# Altium PCB broken_sodimm_dq_widths.PcbDoc (part 4 of 7)
Units mm, origin at the board's own origin, x right, y up, seen from the top; angles counter-clockwise.
Board outline 69.63 x 30.03 mm, 8 copper layers (TOP, SPLIT2, S3, VDD4, S5, S6, SPLIT7, BOTTOM), stack 1.2 mm thick; 199 components, 229 nets, 1321 pads, 785 vias.
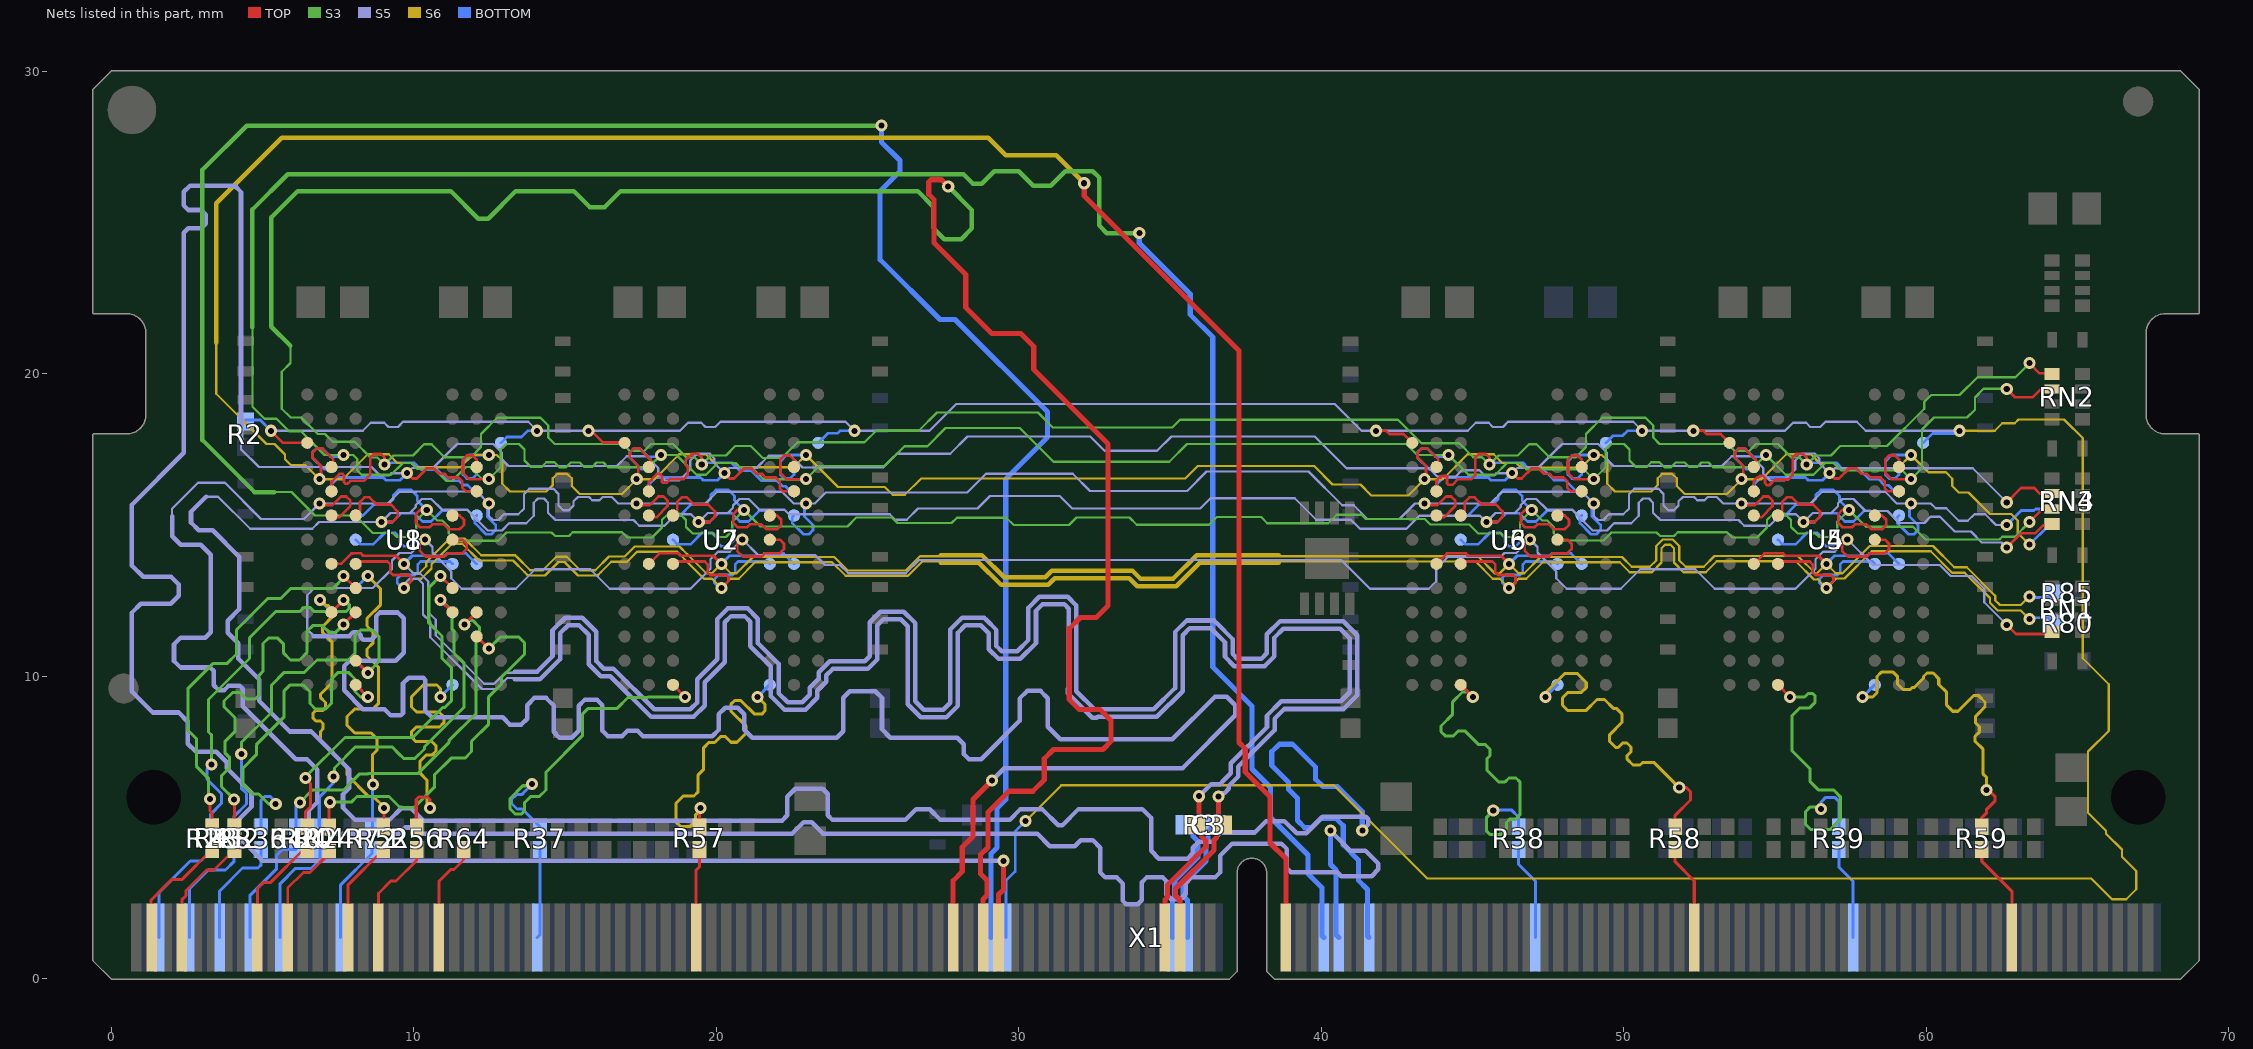
[diagram p9: the nets of this part, all layers, seen from the top]

## Via types
v1: diameter 0.4, hole 0.2, TOP to BOTTOM, tented both sides, 785 vias

## Nets (pads, with @x,y where several pads share a name; then routed paths per layer and width w, separated by ;. In a path a pad name is that pad's centre, name@x,y a point inside that pad or via, vN(x,y) a via of type N, cw(c..) or ccw(c..) an arc to the next point about the centre after c; other vN are vias at no path point) (continued)
A15: RN3.4 U1.H7 U2.H7 U3.H7 U4.H7 U5.H7 U6.H7 U7.H7 U8.H7 X1.156 | length 158.9
  TOP w0.09: U1.H7@8.073,15.317 8.212,15.456 8.212,15.768 8.362,15.918 8.531,15.918 8.769,15.68 9.235,15.68 9.461,15.454 9.461,15.276 9.285,15.1 v1(8.923,15.1) ; U2.H7@18.563,15.317 18.702,15.456 18.702,15.768 18.852,15.918 19.021,15.918 19.259,15.68 19.725,15.68 19.951,15.454 19.951,15.276 19.775,15.1 v1(19.413,15.1) ; U3.H7@44.603,15.317 44.742,15.456 44.742,15.768 44.892,15.918 45.061,15.918 45.299,15.68 45.765,15.68 45.991,15.454 45.991,15.276 45.815,15.1 v1(45.453,15.1) ; U4.H7@55.093,15.317 55.232,15.456 55.232,15.768 55.382,15.918 55.551,15.918 55.789,15.68 56.255,15.68 56.481,15.454 56.481,15.276 56.305,15.1 v1(55.943,15.1) ; v1(62.656,14.253) 63.136,14.733 63.599,14.733 63.855,14.989 64.134,14.989 RN3.4@64.149,14.974
  S5 w0.075: 3.126,15.94 3.523,15.94 4.583,14.88 6.635,14.88 6.856,15.1 v1(8.923,15.1) 9.226,15.403 9.864,15.403 10.06,15.598 10.06,15.666 10.255,15.861 10.573,15.861 10.924,15.511 11.752,15.511 12.441,14.822 12.907,14.822 13.142,15.057 13.714,15.057 13.963,15.306 13.963,15.74 14.101,15.878 14.295,15.878 14.433,15.74 14.433,15.411 14.678,15.166 17.254,15.166 17.446,14.974 18.285,14.974 18.667,15.356 19.157,15.356 v1(19.413,15.1) 19.716,15.403 20.378,15.403 20.55,15.575 20.55,15.649 20.763,15.861 21.063,15.861 21.414,15.511 22.242,15.511 22.398,15.355 25.727,15.355 25.904,15.178 26.291,15.178 26.66,15.547 28.628,15.547 29.04,15.959 31.352,15.959 31.764,15.547 35.993,15.547 36.331,15.886 39.12,15.886 39.827,15.178 40.976,15.178 41.275,14.88 42.809,14.88 43.241,15.312 45.241,15.312 v1(45.453,15.1) 45.755,15.403 46.394,15.403 46.59,15.598 46.59,15.666 46.785,15.861 47.103,15.861 47.454,15.511 48.282,15.511 48.971,14.822 49.437,14.822 49.672,15.057 50.244,15.057 50.493,15.306 50.493,15.74 50.631,15.878 50.825,15.878 50.963,15.74 50.963,15.411 51.208,15.166 53.784,15.166 53.976,14.974 54.815,14.974 55.197,15.356 55.687,15.356 v1(55.943,15.1) 56.246,15.403 56.857,15.403 57.081,15.626 57.081,15.718 57.224,15.861 57.593,15.861 57.987,15.468 58.712,15.468 59.108,15.072 59.935,15.072 60.143,15.279 60.443,15.279 60.939,14.784 61.476,14.784 61.833,14.427 62.482,14.427 v1(62.656,14.253)
  S5 w0.15: 3.126,15.94 2.628,15.442 2.628,15.083 2.882,14.829 3.344,14.829 4.216,13.957 4.216,12.219 3.839,11.842 3.839,11.442 4.193,11.088 4.193,10.589 4.889,9.893 4.889,9.185 5.898,8.176 6.609,8.176 7.852,6.933 7.852,6.3 7.653,6.101 7.653,5.659 8.06,5.252 9.19,5.252 9.576,5.638 9.909,5.638 10.295,5.252 10.322,5.225 22.168,5.225 22.345,5.402 22.345,6.021 22.602,6.278 23.519,6.278 23.679,6.118 23.679,5.409 23.836,5.252 26.246,5.252 26.598,5.604 27.052,5.604 27.404,5.252 29.69,5.252 30.05,5.612 30.764,5.612 31.295,5.081 31.438,5.081 31.969,5.612 34.075,5.612 34.369,5.318 34.369,4.228 34.623,3.974 35.572,3.974 35.751,4.153 35.751,4.336 35.952,4.537 36.381,4.537 36.681,4.837 37.793,4.837 38.167,5.211 38.778,5.211 39.181,4.808 39.494,4.808 40.045,5.359 41.466,5.359 41.551,5.274 41.551,5.101 v1(41.35,4.9)
  BOTTOM w0.09: v1(8.923,15.1) 9.285,15.1 9.58,15.395 10.004,15.395 10.284,15.115 10.562,15.115 10.919,15.472 11.118,15.472 U8.H7@11.273,15.317 ; v1(19.413,15.1) 19.775,15.1 20.07,15.395 20.494,15.395 20.774,15.115 21.052,15.115 21.409,15.472 21.608,15.472 U7.H7@21.763,15.317 ; v1(45.453,15.1) 45.815,15.1 46.11,15.395 46.534,15.395 46.814,15.115 47.092,15.115 47.449,15.472 47.648,15.472 U6.H7@47.803,15.317 ; v1(55.943,15.1) 56.305,15.1 56.6,15.395 57.024,15.395 57.304,15.115 57.582,15.115 57.939,15.472 58.138,15.472 U5.H7@58.293,15.317
  BOTTOM w0.17: v1(41.35,4.9) 41.35,5.53 40.525,6.355 40.049,6.355 39.809,6.595 39.809,6.996 39.049,7.756 38.611,7.756 38.359,7.504 38.359,7.056 38.914,6.501 38.914,6.266 39.21,5.97 39.21,5.23 39.446,4.994 39.673,4.994 39.989,5.31 40.47,5.31 40.72,5.06 40.72,4.43 41.22,3.93 41.22,3.26 41.523,2.957 41.523,1.417 X1.156@41.575,1.365
A16: RN4.2 U1.H8 U2.H8 U3.H8 U4.H8 U5.H8 U6.H8 U7.H8 U8.H8 X1.152 | length 151.9
  TOP w0.09: v1(6.873,15.717) 6.928,15.662 7.306,15.662 7.588,15.944 7.757,15.944 7.895,15.806 7.895,15.627 7.524,15.256 7.334,15.256 U1.H8@7.273,15.317 ; v1(17.363,15.717) 17.418,15.662 17.796,15.662 18.078,15.944 18.247,15.944 18.385,15.806 18.385,15.627 18.015,15.256 17.824,15.256 U2.H8@17.763,15.317 ; v1(43.403,15.717) 43.458,15.662 43.836,15.662 44.118,15.944 44.287,15.944 44.425,15.806 44.425,15.627 44.054,15.256 43.863,15.256 U3.H8@43.803,15.317 ; v1(53.893,15.717) 53.948,15.662 54.326,15.662 54.608,15.944 54.777,15.944 54.915,15.806 54.915,15.627 54.544,15.256 54.354,15.256 U4.H8@54.293,15.317
  S5 w0.075: 2.004,15.29 2.004,15.542 2.86,16.398 3.749,16.398 4.943,15.205 6.361,15.205 v1(6.873,15.717) 6.877,15.713 9.143,15.713 9.533,16.103 10.075,16.103 10.081,16.109 12.081,16.109 v1(12.473,15.717) 12.473,15.312 12.614,15.171 12.794,15.171 12.978,15.355 13.447,15.355 13.635,15.543 13.635,16.021 13.812,16.198 14.609,16.198 14.781,16.026 14.781,15.649 14.936,15.494 15.124,15.494 15.276,15.646 15.276,15.785 15.42,15.93 15.786,15.93 15.893,15.823 16.131,15.823 16.238,15.93 16.538,15.93 16.751,15.717 v1(17.363,15.717) 17.368,15.713 19.633,15.713 20.023,16.103 22.167,16.103 22.553,15.717 v1(22.963,15.717) 23.25,15.717 23.613,16.08 28.289,16.08 28.908,16.699 31.78,16.699 32.351,16.128 35.563,16.128 36.204,16.769 39.57,16.769 40.686,15.653 41.067,15.653 41.516,15.205 42.578,15.205 43.091,15.717 v1(43.403,15.717) 43.408,15.713 45.593,15.713 45.983,16.103 48.618,16.103 v1(49.003,15.717) 49.003,15.312 49.144,15.171 49.324,15.171 49.508,15.355 49.977,15.355 50.166,15.543 50.166,16.021 50.343,16.198 51.139,16.198 51.311,16.026 51.311,15.649 51.466,15.494 51.654,15.494 51.806,15.646 51.806,15.785 51.95,15.93 52.316,15.93 52.423,15.823 52.661,15.823 52.768,15.93 53.068,15.93 53.281,15.717 v1(53.893,15.717) 53.897,15.713 56.163,15.713 56.553,16.103 58.638,16.103 59.023,15.717 v1(59.493,15.717) 60.145,15.717 60.308,15.555 60.655,15.555 61.07,15.139 61.37,15.139 61.59,15.359 61.947,15.359 62.303,15.003 v1(62.656,15.003)
  S5 w0.15: 2.004,15.29 2.004,14.636 2.292,14.348 2.955,14.348 3.285,14.018 3.285,11.457 3.103,11.275 2.282,11.275 2.066,11.059 2.066,10.507 2.282,10.291 3.265,10.291 3.377,10.179 3.377,9.707 3.537,9.547 3.733,9.547 3.868,9.682 4.247,9.682 4.336,9.593 4.336,9.009 6.087,7.258 6.463,7.258 6.809,6.912 6.809,5.846 6.514,5.551 6.514,5.062 6.774,4.802 9.508,4.802 9.708,5.002 9.954,5.002 10.154,4.802 22.506,4.802 22.878,5.174 23.147,5.174 23.519,4.802 30.6,4.802 31.02,4.382 31.845,4.382 32.046,4.583 32.446,4.583 32.691,4.338 32.691,3.516 32.857,3.35 33.236,3.35 33.439,3.147 33.439,2.574 33.549,2.464 33.925,2.464 34.054,2.593 34.054,3.186 34.218,3.35 34.749,3.35 34.878,3.221 34.878,2.781 35.03,2.629 35.343,2.629 35.513,2.799 35.513,3.162 35.701,3.35 36.482,3.35 36.647,3.515 36.647,4.063 37.055,4.471 38.677,4.471 38.859,4.289 38.859,3.655 38.992,3.522 40.531,3.522 40.658,3.395 41.66,3.395 41.883,3.618 41.883,3.81 41.455,4.238 40.962,4.238 v1(40.3,4.9)
  BOTTOM w0.09: U8.H8@12.073,15.317 12.012,15.256 12.012,15.066 12.382,14.696 12.563,14.696 12.7,14.833 12.7,15.002 12.418,15.284 12.418,15.662 v1(12.473,15.717) ; U7.H8@22.563,15.317 22.502,15.256 22.502,15.066 22.872,14.696 23.053,14.696 23.19,14.833 23.19,15.002 22.908,15.284 22.908,15.662 v1(22.963,15.717) ; U6.H8@48.603,15.317 48.542,15.256 48.542,15.066 48.912,14.696 49.093,14.696 49.23,14.833 49.23,15.002 48.948,15.284 48.948,15.662 v1(49.003,15.717) ; U5.H8@59.093,15.317 59.032,15.256 59.032,15.066 59.402,14.696 59.583,14.696 59.72,14.833 59.72,15.002 59.438,15.284 59.438,15.662 v1(59.493,15.717) ; v1(62.656,15.003) 63.136,15.483 63.559,15.483 63.609,15.533 RN4.2@64.149,15.533
  BOTTOM w0.17: v1(40.3,4.9) 40.3,3.779 40.486,3.593 40.486,1.454 X1.152@40.575,1.365
ACT: RN3.3 U1.H3 U2.H3 U3.H3 U4.H3 U5.H3 U6.H3 U7.H3 U8.H3 X1.114 | length 158.2
  TOP w0.09: v1(10.423,15.499) 10.196,15.499 10.067,15.37 10.067,15.066 10.204,14.929 10.518,14.929 10.615,15.026 10.994,15.026 11.158,14.862 11.509,14.862 11.652,15.005 11.652,15.175 11.51,15.317 U1.H3@11.273,15.317 ; v1(20.913,15.499) 20.686,15.499 20.557,15.37 20.557,15.066 20.694,14.929 21.008,14.929 21.105,15.026 21.484,15.026 21.648,14.862 21.999,14.862 22.142,15.005 22.142,15.175 22,15.317 U2.H3@21.763,15.317 ; v1(46.953,15.499) 46.726,15.499 46.597,15.37 46.597,15.066 46.734,14.929 47.048,14.929 47.145,15.026 47.524,15.026 47.688,14.862 48.039,14.862 48.182,15.005 48.182,15.175 48.04,15.317 U3.H3@47.803,15.317 ; v1(57.443,15.499) 57.216,15.499 57.087,15.37 57.087,15.066 57.224,14.929 57.538,14.929 57.635,15.026 58.014,15.026 58.178,14.862 58.529,14.862 58.672,15.005 58.672,15.175 58.53,15.317 U4.H3@58.293,15.317 ; v1(63.406,15.103) 63.816,15.513 64.129,15.513 RN3.3@64.149,15.533
  S3 w0.075: 5.381,16.092 5.952,16.092 6.727,15.317 8.056,15.317 8.636,14.738 9.299,14.738 9.435,14.602 9.823,14.602 10.073,14.852 10.073,15.149 v1(10.423,15.499) 10.773,15.149 10.931,15.149 11.146,14.934 11.146,14.729 11.393,14.482 12.785,14.482 13.06,14.757 14.545,14.757 14.667,14.635 15.125,14.635 15.252,14.762 16.879,14.762 17.054,14.587 17.872,14.587 18.202,14.917 18.202,15.173 18.405,15.376 18.79,15.376 18.994,15.172 18.994,14.939 19.213,14.72 19.901,14.72 20.019,14.602 20.313,14.602 20.526,14.815 20.526,15.112 v1(20.913,15.499) 21.456,14.956 24.328,14.956 24.62,15.249 25.799,15.249 25.981,15.066 27.771,15.066 27.948,15.243 29.584,15.243 29.827,15 31.651,15 31.905,15.254 33.652,15.254 33.895,15.011 36.283,15.011 36.537,15.265 38.008,15.265 38.212,15.061 40.224,15.061 40.506,15.343 41.323,15.343 41.461,15.205 43.419,15.205 43.601,15.022 44.884,15.022 45.187,14.72 45.936,14.72 46.053,14.603 46.353,14.603 46.565,14.815 46.565,15.112 v1(46.953,15.499) 47.303,15.149 47.461,15.149 47.676,14.934 47.676,14.729 47.915,14.49 49.323,14.49 49.59,14.757 51.075,14.757 51.197,14.635 51.655,14.635 51.782,14.762 53.409,14.762 53.584,14.587 54.402,14.587 54.732,14.917 54.732,15.173 54.935,15.376 55.32,15.376 55.524,15.172 55.524,14.939 55.744,14.72 56.337,14.72 56.455,14.602 56.843,14.602 57.056,14.815 57.056,15.112 v1(57.443,15.499) 58.001,14.941 59.554,14.941 59.973,14.522 62.412,14.522 62.506,14.616 62.919,14.616 v1(63.406,15.103)
  S3 w0.15: 5.381,16.092 4.727,16.092 3.008,17.811 3.008,26.744 4.469,28.205 v1(25.45,28.205)
  BOTTOM w0.09: U8.H3@8.073,15.317 8.312,15.317 8.675,15.68 9.127,15.68 9.318,15.871 9.318,15.987 9.496,16.165 9.902,16.165 10.107,15.96 10.107,15.815 v1(10.423,15.499) ; U7.H3@18.563,15.317 18.802,15.317 19.165,15.68 19.617,15.68 19.808,15.871 19.808,15.987 19.986,16.165 20.392,16.165 20.597,15.96 20.597,15.815 v1(20.913,15.499) ; U6.H3@44.603,15.317 44.842,15.317 45.205,15.68 45.657,15.68 45.848,15.871 45.848,15.987 46.026,16.165 46.432,16.165 46.637,15.96 46.637,15.815 v1(46.953,15.499) ; U5.H3@55.093,15.317 55.332,15.317 55.695,15.68 56.147,15.68 56.338,15.871 56.338,15.987 56.516,16.165 56.922,16.165 57.127,15.96 57.127,15.815 v1(57.443,15.499)
  BOTTOM w0.17: v1(25.45,28.205) 25.45,27.665 26.065,27.05 26.065,26.7 25.411,26.046 25.411,23.771 27.386,21.796 27.887,21.796 30.949,18.734 30.949,17.909 29.562,16.522 29.562,5.926 29.28,5.644 29.28,4.341 29.075,4.136 X1.114@29.075,1.365
ALERT: R2.1 U1.L9 U2.L9 U3.L9 U4.L9 U5.L9 U6.L9 U7.L9 U8.L9 X1.116 | length 133.6
  TOP w0.09: v1(5.273,18.117) 5.673,17.717 U1.L9@6.473,17.717 ; v1(15.763,18.117) 15.866,18.117 16.251,17.732 16.948,17.732 U2.L9@16.963,17.717 ; v1(41.803,18.117) 42.142,18.117 42.247,18.012 42.708,18.012 U3.L9@43.003,17.717 ; v1(52.293,18.117) 52.632,18.117 52.737,18.012 53.198,18.012 U4.L9@53.493,17.717
  S5 w0.075: v1(5.273,18.117) 8.305,18.117 8.568,18.38 9.021,18.38 9.156,18.244 9.473,18.244 9.641,18.412 13.778,18.412 v1(14.073,18.117) v1(15.763,18.117) 18.795,18.117 19.058,18.38 19.501,18.38 19.636,18.244 19.963,18.244 20.131,18.412 24.268,18.412 v1(24.563,18.117) 27.042,18.117 27.926,19.001 40.439,19.001 41.323,18.117 v1(41.803,18.117) 44.835,18.117 45.098,18.38 45.529,18.38 45.664,18.244 46.003,18.244 46.171,18.412 50.308,18.412 v1(50.603,18.117) v1(52.293,18.117) 55.325,18.117 55.588,18.38 56.026,18.38 56.161,18.244 56.493,18.244 56.661,18.412 57.7,18.412 57.995,18.117 v1(61.093,18.117)
  S6 w0.075: v1(30.216,5.212) 31.403,6.399 40.414,6.399 43.5,3.313 65.45,3.313 66.133,2.63 66.605,2.63 66.937,2.962 66.937,3.56 66.463,4.034 66.463,4.276 65.94,4.798 65.94,4.892 65.343,5.489 65.343,7.515 66.025,8.196 66.025,9.738 65.165,10.598 65.165,17.877 64.551,18.491 63.043,18.491 62.918,18.366 62.506,18.366 62.257,18.117 v1(61.093,18.117)
  BOTTOM w0.09: R2.1@4.428,18.473 4.917,18.473 v1(5.273,18.117) ; U8.L9@12.873,17.717 13.069,17.913 13.554,17.913 13.758,18.117 v1(14.073,18.117) ; U7.L9@23.363,17.717 23.678,18.032 23.997,18.032 24.082,18.117 v1(24.563,18.117) ; X1.116@29.575,1.365 29.575,3.25 29.874,3.549 29.874,4.87 v1(30.216,5.212) ; U6.L9@49.403,17.717 49.639,17.953 49.958,17.953 50.122,18.117 v1(50.603,18.117) ; U5.L9@59.893,17.717 60.201,18.025 60.923,18.025 61.015,18.117 v1(61.093,18.117)
BA0: RN2.2 U1.K2 U2.K2 U3.K2 U4.K2 U5.K2 U6.K2 U7.K2 U8.K2 X1.150 | length 153.4
  TOP w0.09: U1.K2@12.073,16.917 12.073,17.168 11.943,17.298 11.747,17.298 11.618,17.169 11.618,16.725 11.826,16.517 v1(12.473,16.517) ; U2.K2@22.563,16.917 22.563,17.168 22.433,17.298 22.237,17.298 22.108,17.169 22.108,16.725 22.316,16.517 v1(22.963,16.517) ; U3.K2@48.603,16.917 48.603,17.168 48.473,17.298 48.277,17.298 48.148,17.169 48.148,16.725 48.356,16.517 v1(49.003,16.517) ; U4.K2@59.093,16.917 59.093,17.168 58.963,17.298 58.767,17.298 58.638,17.169 58.638,16.725 58.846,16.517 v1(59.493,16.517) ; v1(62.656,19.503) 62.936,19.223 63.514,19.223 63.766,19.475 64.121,19.475 RN2.2@64.149,19.503
  S3 w0.075: 4.66,21.539 4.66,18.914 5.057,18.517 5.453,18.517 5.869,18.101 6.261,18.101 7.045,17.317 v1(7.673,17.317) 7.996,17.317 8.126,17.187 8.126,16.805 8.268,16.663 9.243,16.663 9.633,17.053 9.913,17.053 10.11,16.855 10.68,16.855 11.079,16.456 11.254,16.456 11.719,16.921 11.849,16.921 12.253,16.517 v1(12.473,16.517) 12.866,16.91 12.866,17.512 13.036,17.682 13.473,17.682 13.655,17.5 13.655,17.136 13.867,16.924 14.225,16.924 14.374,17.073 14.649,17.073 14.812,16.91 15.024,16.91 15.181,17.067 15.484,17.067 15.622,16.929 15.894,16.929 16.032,17.067 16.262,17.067 16.419,16.91 17.756,16.91 v1(18.163,17.317) 18.683,17.317 19.337,16.663 19.653,16.663 20.043,17.053 20.632,17.053 20.773,16.912 21.158,16.912 21.552,16.517 v1(22.963,16.517) 23.4,16.954 25.558,16.954 26.213,17.609 26.976,17.609 27.573,18.206 30.026,18.206 31.14,17.092 34.97,17.092 35.558,17.679 42.807,17.679 43.169,17.317 v1(44.203,17.317) 44.857,16.663 45.744,16.663 46.134,17.053 46.566,17.053 46.774,16.845 48.675,16.845 v1(49.003,16.517) 49.396,16.91 49.396,17.512 49.566,17.682 50.003,17.682 50.185,17.5 50.185,17.136 50.397,16.924 50.755,16.924 50.904,17.073 51.179,17.073 51.342,16.91 51.554,16.91 51.711,17.067 52.014,17.067 52.152,16.929 52.424,16.929 52.562,17.067 52.792,17.067 52.949,16.91 54.286,16.91 v1(54.693,17.317) 55.347,16.663 56.263,16.663 56.653,17.053 56.933,17.053 57.18,16.805 59.205,16.805 v1(59.493,16.517) 59.855,16.88 59.855,18.157 60.253,18.555 61.345,18.555 61.604,18.813 61.604,19.22 61.887,19.503 v1(62.656,19.503)
  S3 w0.15: 4.66,21.539 4.66,25.432 5.826,26.598 28.166,26.598 28.479,26.286 28.767,26.286 29.182,26.7 29.989,26.7 30.475,26.214 31.048,26.214 31.534,26.7 32.44,26.7 32.651,26.489 32.651,24.906 32.906,24.651 v1(33.978,24.651)
  BOTTOM w0.09: U8.K2@7.273,16.917 7.212,16.856 7.022,16.856 6.652,17.226 6.652,17.407 6.789,17.544 6.958,17.544 7.24,17.262 7.618,17.262 v1(7.673,17.317) ; U7.K2@17.763,16.917 17.702,16.856 17.512,16.856 17.142,17.226 17.142,17.407 17.279,17.544 17.448,17.544 17.73,17.262 18.108,17.262 v1(18.163,17.317) ; U6.K2@43.803,16.917 43.742,16.856 43.552,16.856 43.182,17.226 43.182,17.407 43.319,17.544 43.488,17.544 43.77,17.262 44.148,17.262 v1(44.203,17.317) ; U5.K2@54.293,16.917 54.232,16.856 54.042,16.856 53.672,17.226 53.672,17.407 53.809,17.544 53.978,17.544 54.26,17.262 54.638,17.262 v1(54.693,17.317)
  BOTTOM w0.17: v1(33.978,24.651) 33.978,24.325 35.665,22.638 35.665,21.956 36.408,21.213 36.408,10.31 37.705,9.013 37.705,6.933 38.317,6.321 38.317,5.332 39.555,4.094 39.555,3.471 40.014,3.012 40.014,1.426 X1.150@40.075,1.365
BA1: RN4.1 U1.K8 U2.K8 U3.K8 U4.K8 U5.K8 U6.K8 U7.K8 U8.K8 X1.145 | length 153.9
  TOP w0.09: v1(6.873,16.517) 6.928,16.572 6.928,16.95 6.646,17.232 6.646,17.401 6.783,17.538 6.964,17.538 7.334,17.168 7.334,16.978 U1.K8@7.273,16.917 ; v1(17.363,16.517) 17.418,16.572 17.418,16.95 17.136,17.232 17.136,17.401 17.273,17.538 17.454,17.538 17.824,17.168 17.824,16.978 U2.K8@17.763,16.917 ; v1(43.403,16.517) 43.458,16.572 43.458,16.95 43.176,17.232 43.176,17.401 43.313,17.538 43.494,17.538 43.864,17.168 43.864,16.978 U3.K8@43.803,16.917 ; v1(53.893,16.517) 53.948,16.572 53.948,16.95 53.666,17.232 53.666,17.401 53.803,17.538 53.984,17.538 54.354,17.168 54.354,16.978 U4.K8@54.293,16.917
  TOP w0.17: v1(32.157,26.3) 32.157,25.883 37.276,20.763 37.276,7.808 37.479,7.605 37.479,6.84 38.302,6.017 38.302,4.493 38.825,3.97 X1.145@38.825,1.365
  S6 w0.075: 3.461,21.03 3.461,19.342 5.123,17.68 5.387,17.68 5.736,17.332 5.736,17.177 5.933,16.98 6.41,16.98 v1(6.873,16.517) 7.649,16.517 8.47,17.338 9.163,17.338 9.448,17.053 9.913,17.053 10.054,16.912 11.529,16.912 11.935,17.317 v1(12.473,17.317) 12.739,17.317 12.917,17.139 12.917,16.367 13.174,16.11 14.376,16.11 14.592,16.325 14.592,16.551 14.741,16.7 15.062,16.7 15.217,16.545 15.217,16.29 15.479,16.028 16.874,16.028 v1(17.363,16.517) 17.948,16.517 18.769,17.338 19.653,17.338 19.938,17.053 20.632,17.053 20.773,16.912 22.557,16.912 v1(22.963,17.317) 24.019,16.261 25.566,16.261 25.828,15.999 26.228,15.999 26.77,16.541 35.498,16.541 35.909,16.952 39.759,16.952 40.368,16.343 41.287,16.343 41.649,15.981 42.867,15.981 v1(43.403,16.517) 44.01,16.517 44.83,17.338 45.693,17.338 45.978,17.053 46.443,17.053 46.595,16.9 48.586,16.9 v1(49.003,17.317) 49.269,17.317 49.447,17.139 49.447,16.367 49.705,16.11 50.906,16.11 51.122,16.325 51.122,16.551 51.271,16.7 51.592,16.7 51.747,16.545 51.747,16.29 52.008,16.028 53.404,16.028 v1(53.893,16.517) 54.548,16.517 55.369,17.338 56.183,17.338 56.468,17.053 56.933,17.053 57.11,16.875 59.051,16.875 v1(59.493,17.317) 60.067,16.743 60.648,16.743 60.858,16.534 60.858,16.292 61.07,16.08 61.389,16.08 62.103,15.366 62.806,15.366 63.018,15.153 63.018,14.741 v1(63.406,14.353)
  S6 w0.15: 3.461,21.03 3.461,25.64 5.626,27.805 28.985,27.805 29.563,27.227 31.23,27.227 v1(32.157,26.3)
  BOTTOM w0.09: U8.K8@12.073,16.917 12.073,16.666 11.943,16.536 11.747,16.536 11.618,16.665 11.618,17.109 11.826,17.317 v1(12.473,17.317) ; U7.K8@22.563,16.917 22.563,16.666 22.433,16.536 22.237,16.536 22.108,16.665 22.108,17.109 22.316,17.317 v1(22.963,17.317) ; U6.K8@48.603,16.917 48.603,16.666 48.473,16.536 48.277,16.536 48.148,16.665 48.148,17.109 48.356,17.317 v1(49.003,17.317) ; U5.K8@59.093,16.917 59.093,16.666 58.963,16.536 58.767,16.536 58.638,16.665 58.638,17.109 58.846,17.317 v1(59.493,17.317) ; v1(63.406,14.353) 64.027,14.974 RN4.1@64.149,14.974
BG0: RN3.2 U1.J2 U2.J2 U3.J2 U4.J2 U5.J2 U6.J2 U7.J2 U8.J2 X1.115 | length 158.3
  TOP w0.09: v1(9.773,16.715) 9.948,16.54 10.091,16.54 10.43,16.879 10.649,16.879 10.832,16.696 11.006,16.696 11.13,16.572 11.469,16.572 11.6,16.441 11.6,16.232 11.715,16.117 U1.J2@12.073,16.117 ; v1(20.263,16.715) 20.438,16.54 20.581,16.54 20.92,16.879 21.139,16.879 21.322,16.696 21.496,16.696 21.62,16.572 21.959,16.572 22.09,16.441 22.09,16.232 22.205,16.117 U2.J2@22.563,16.117 ; v1(46.303,16.715) 46.478,16.54 46.621,16.54 46.96,16.879 47.179,16.879 47.362,16.696 47.536,16.696 47.66,16.572 47.999,16.572 48.13,16.441 48.13,16.232 48.245,16.117 U3.J2@48.603,16.117 ; v1(56.793,16.715) 56.968,16.54 57.111,16.54 57.45,16.879 57.669,16.879 57.852,16.696 58.026,16.696 58.15,16.572 58.489,16.572 58.62,16.441 58.62,16.232 58.735,16.117 U4.J2@59.093,16.117 ; v1(62.656,15.753) 63.126,16.223 63.564,16.223 63.744,16.043 64.147,16.043 RN3.2@64.149,16.041
  TOP w0.17: X1.115@29.325,1.365 29.325,2.783 29.485,2.943 v1(29.485,3.902)
  S5 w0.075: 4.281,17.786 4.281,17.509 4.873,16.917 8.593,16.917 8.873,16.637 9.169,16.637 9.247,16.715 v1(9.773,16.715) 9.944,16.887 10.633,16.887 11.425,17.679 12.623,17.679 12.91,17.392 12.91,17.167 13.123,16.954 16.713,16.954 17.033,17.275 17.693,17.275 18.077,16.89 18.077,16.699 18.302,16.474 18.772,16.474 19.133,16.835 19.133,17.133 19.363,17.363 19.771,17.363 19.93,17.204 19.93,17.048 v1(20.263,16.715) 20.435,16.887 21.322,16.887 21.73,17.294 22.454,17.294 22.841,16.907 25.511,16.907 25.959,17.355 27.728,17.355 28.298,17.925 32.358,17.925 32.829,17.454 34.567,17.454 35.042,17.929 39.779,17.929 40.829,16.88 43.553,16.88 43.836,16.597 44.429,16.597 44.645,16.813 45.227,16.813 45.403,16.638 45.703,16.638 45.781,16.715 v1(46.303,16.715) 46.474,16.887 47.162,16.887 47.955,17.679 49.153,17.679 49.441,17.392 49.441,17.167 49.653,16.954 53.243,16.954 53.563,17.275 54.223,17.275 54.607,16.89 54.607,16.699 54.832,16.474 55.302,16.474 55.663,16.835 55.663,17.133 55.893,17.363 56.301,17.363 56.46,17.204 56.46,17.048 v1(56.793,16.715) 56.957,16.88 61.53,16.88 v1(62.656,15.753)
  S5 w0.15: 4.281,17.786 4.281,26.01 4.071,26.22 2.597,26.22 2.391,26.014 2.391,25.716 2.391,25.566 2.541,25.416 2.966,25.416 3.116,25.266 3.116,24.966 2.966,24.816 2.541,24.816 2.391,24.666 2.391,24.638 2.391,17.388 0.677,15.674 0.677,13.657 1.047,13.287 1.969,13.287 2.219,13.037 2.219,12.662 1.959,12.402 0.971,12.402 0.677,12.108 0.677,9.489 1.362,8.804 2.22,8.804 2.524,8.5 2.524,7.775 2.794,7.505 3.461,7.505 3.806,7.16 3.806,6.969 4.629,6.146 4.629,5.687 4.15,5.208 4.15,4.746 4.994,3.902 v1(29.485,3.902)
  BOTTOM w0.09: U8.J2@7.273,16.117 7.273,16.338 7.507,16.572 8.984,16.572 9.073,16.483 9.541,16.483 v1(9.773,16.715) ; U7.J2@17.763,16.117 17.763,16.338 17.997,16.572 19.474,16.572 19.563,16.483 20.031,16.483 v1(20.263,16.715) ; U6.J2@43.803,16.117 43.803,16.338 44.037,16.572 45.514,16.572 45.603,16.483 46.071,16.483 v1(46.303,16.715) ; U5.J2@54.293,16.117 54.293,16.338 54.527,16.572 56.004,16.572 56.093,16.483 56.561,16.483 v1(56.793,16.715)
BG1: RN2.1 U1.J8 U2.J8 U3.J8 U4.J8 U5.J8 U6.J8 U7.J8 U8.J8 X1.113 | length 163.6
  TOP w0.09: U1.J8@7.273,16.117 7.273,16.429 7.539,16.695 7.633,16.695 7.688,16.64 7.688,16.419 7.742,16.365 7.805,16.365 7.902,16.462 8.349,16.462 8.557,16.67 8.557,17.237 8.674,17.354 8.906,17.354 9.023,17.237 v1(9.023,17) ; U2.J8@17.763,16.117 17.763,16.429 18.029,16.695 18.126,16.695 18.199,16.622 18.199,16.436 18.237,16.398 18.35,16.398 18.472,16.52 18.917,16.52 19.047,16.65 19.047,16.918 18.983,16.982 18.983,17.144 19.102,17.263 19.193,17.354 19.396,17.354 19.513,17.237 v1(19.513,17) ; U3.J8@43.803,16.117 43.803,16.479 43.896,16.572 43.946,16.572 43.994,16.62 44.116,16.62 44.154,16.582 44.154,16.375 44.198,16.331 44.329,16.331 44.517,16.519 44.956,16.519 45.087,16.65 45.087,17.237 45.204,17.354 45.436,17.354 45.553,17.237 v1(45.553,17) ; U4.J8@54.293,16.117 54.293,16.469 54.396,16.572 54.436,16.572 54.493,16.629 54.608,16.629 54.663,16.574 54.663,16.389 54.735,16.317 54.805,16.317 54.998,16.51 55.437,16.51 55.577,16.65 55.577,17.237 55.694,17.354 55.926,17.354 56.043,17.237 v1(56.043,17) ; v1(63.406,20.353) 63.742,20.017 64.104,20.017 RN2.1@64.149,20.062
  TOP w0.17: v1(27.661,26.198) 27.442,26.417 27.093,26.417 27.018,26.342 27.018,25.935 27.197,25.756 27.197,24.329 28.243,23.283 28.243,22.194 29.108,21.329 30.065,21.329 30.491,20.903 30.491,20.14 32.945,17.686 32.945,12.336 32.558,11.949 32.039,11.949 31.663,11.573 31.663,9.229 31.994,8.898 32.692,8.898 33.046,8.544 33.046,7.853 32.776,7.583 31.144,7.583 30.834,7.273 30.834,6.577 30.458,6.201 29.673,6.201 28.977,5.505 28.977,4.344 28.733,4.1 28.733,3.471 28.938,3.266 28.938,2.754 28.806,2.622 28.806,1.384 X1.113@28.825,1.365
  S3 w0.075: 5.917,20.925 5.917,20.354 5.63,20.067 5.63,18.847 5.923,18.555 6.268,18.555 6.815,18.008 7.062,18.008 7.317,17.753 8.044,17.753 8.563,17.234 8.789,17.234 v1(9.023,17) 9.326,17.303 9.964,17.303 10.335,17.674 10.583,17.674 11.011,17.246 11.884,17.246 12.216,17.578 12.216,18.009 12.752,18.545 14.183,18.545 14.436,18.293 14.436,17.895 14.65,17.68 16.905,17.68 17.134,17.451 17.609,17.451 17.838,17.68 18.567,17.68 19.012,17.235 19.278,17.235 v1(19.513,17) 19.816,17.303 20.313,17.303 20.622,17.612 21.136,17.612 21.531,17.216 22.161,17.216 22.681,17.736 24.897,17.736 25.278,18.117 26.689,18.117 27.291,18.719 30.63,18.719 31.121,18.228 35.069,18.228 35.321,18.48 42.533,18.48 43.31,17.702 44.562,17.702 45.019,17.245 45.308,17.245 v1(45.553,17) 45.855,17.303 46.493,17.303 46.865,17.674 47.113,17.674 47.541,17.246 48.414,17.246 48.746,17.578 48.746,18.009 49.282,18.545 50.713,18.545 50.965,18.293 50.965,17.895 51.18,17.68 53.435,17.68 53.664,17.451 54.139,17.451 54.368,17.68 55.097,17.68 55.542,17.235 55.808,17.235 v1(56.043,17) 56.346,17.303 56.843,17.303 57.152,17.612 58.7,17.612 59.93,18.842 59.93,19.067 60.16,19.297 61.097,19.297 61.69,19.891 62.943,19.891 v1(63.406,20.353)
  S3 w0.15: 5.917,20.925 5.287,21.555 5.287,25.17 6.16,26.043 11.213,26.043 12.13,25.126 12.451,25.126 13.368,26.043 15.28,26.043 15.81,25.513 16.303,25.513 16.833,26.043 26.655,26.043 27.186,25.512 27.186,24.793 27.527,24.452 28.089,24.452 28.443,24.806 28.443,25.416 v1(27.661,26.198)
  BOTTOM w0.09: v1(9.023,17) 9.083,17.06 10.004,17.06 10.229,16.836 10.766,16.836 11.14,16.462 11.483,16.462 11.617,16.328 11.769,16.328 11.98,16.117 U8.J8@12.073,16.117 ; v1(19.513,17) 19.573,17.06 20.506,17.06 20.772,16.794 21.156,16.794 21.488,16.462 22,16.462 22.176,16.286 22.275,16.286 22.444,16.117 U7.J8@22.563,16.117 ; v1(45.553,17) 45.613,17.06 46.654,17.06 46.81,16.904 47.268,16.904 47.686,16.486 48.059,16.486 48.428,16.117 U6.J8@48.603,16.117 ; v1(56.043,17) 56.103,17.06 57.018,17.06 57.232,16.846 57.771,16.846 57.821,16.796 57.825,16.796 58.099,16.522 58.41,16.522 58.62,16.312 58.755,16.312 58.95,16.117 U5.J8@59.093,16.117
CK0_N: C3.2 R85.1 U1.F8 U2.F8 U3.F8 U4.F8 U5.F8 U6.F8 U7.F8 U8.F8 X1.139 | length 157.5
  TOP w0.09: U1.F8@7.273,13.717 7.585,13.717 7.93,14.062 7.974,14.062 7.977,14.065 8.245,14.065 8.323,13.987 9.403,13.987 v1(9.673,13.717) ; U2.F8@17.763,13.717 18.111,14.065 18.735,14.065 18.813,13.987 19.893,13.987 v1(20.163,13.717) ; U3.F8@43.803,13.717 44.151,14.065 44.775,14.065 44.853,13.987 45.933,13.987 v1(46.203,13.717) ; U4.F8@54.293,13.717 54.641,14.065 55.265,14.065 55.343,13.987 56.423,13.987 v1(56.693,13.717)
  TOP w0.17: X1.139@35.325,1.365 35.325,2.604 35.175,2.753 35.175,2.984 36.444,4.254 36.444,4.578 36.531,4.665 36.531,4.879 36.73,5.078 36.745,5.093 36.6,5.238 v1(36.6,6.03)
  S5 w0.075: v1(9.673,13.717) 9.996,13.394 10.211,13.394 10.473,13.132 10.473,12.117 10.717,11.873 10.717,11.36 12.323,9.755 12.648,9.755 13.012,10.119 13.292,10.119 13.329,10.156
  S5 w0.15: 13.329,10.156 14.068,10.156 14.579,10.667 14.579,11.523 14.995,11.939 15.559,11.939 16.024,11.474 16.024,10.505 16.274,10.255 16.594,10.255 17.941,8.908 19.138,8.908 19.363,9.133 19.363,9.903 20.029,10.569 20.029,11.894 20.378,12.243 21.031,12.243 21.366,11.908 21.366,11.101 22.052,10.415 22.052,9.444 22.352,9.144 22.839,9.144 23.085,9.39 23.085,9.621 23.385,9.921 23.385,10.135 23.744,10.494 24.902,10.494 25.067,10.659 25.067,11.785 25.42,12.138 26.195,12.138 26.571,11.762 26.571,9.181 26.856,8.896 27.5,8.896 27.733,9.129 27.733,11.548 28.053,11.868 28.126,11.941 28.846,11.941 28.919,11.868 29.256,11.531 29.256,11.002 29.427,10.831 29.943,10.831 30.314,11.202 30.314,12.27 30.674,12.63 31.608,12.63 31.895,12.343 31.895,11.192 31.895,9.509 32.496,8.908 34.457,8.908 35.161,9.612 35.161,11.465 35.541,11.845 36.45,11.845 36.562,11.733 37.062,11.233 37.062,10.745 37.221,10.586 38.016,10.586 38.196,10.766 38.196,11.385 38.631,11.82 40.723,11.82 41.189,11.353 41.189,9.371 40.739,8.92 38.771,8.92 38.45,8.599 38.45,8.213 37.254,7.017 37.254,6.69 36.938,6.375 36.938,6.28 36.794,6.136 v1@36.6,6.136
  S6 w0.075: v1(9.673,13.717) 9.985,13.404 10.171,13.404 10.407,13.64 10.407,13.778 11.186,14.556 11.67,14.556 12.22,14.006 13.344,14.006 13.393,13.957 13.844,13.506 14.261,13.506 14.707,13.952 15.051,13.952 15.497,13.506 15.992,13.506 16.447,13.962 16.966,13.962 17.298,14.293 18.774,14.293 19.033,14.034 19.663,13.404 19.85,13.404 v1(20.163,13.717) 20.475,13.404 20.662,13.404 21.205,13.948 23.892,13.948 24.343,13.497 26.258,13.497 26.732,13.971 27.374,13.971 27.41,14.007 ; 38.582,14.007 38.619,13.97 45.17,13.97 45.738,13.402 45.888,13.402 v1(46.203,13.717) 46.516,13.404 46.701,13.404 47.245,13.948 49.932,13.948 50.261,13.62 50.855,13.62 51.068,13.832 51.068,14.305 51.283,14.521 51.613,14.521 51.828,14.305 51.828,13.832 52.041,13.62 52.635,13.62 52.997,13.981 55.749,13.981 56.34,13.39 56.366,13.39 v1(56.693,13.717) 57.002,13.408 57.223,13.408 58.123,14.307 60.214,14.307 60.919,13.602 61.335,13.602 62.278,12.659 62.278,12.507 62.431,12.354 63.116,12.354 v1(63.406,12.645)
  S6 w0.15: 27.41,14.007 28.778,14.007 29.512,13.272 30.864,13.272 31.079,13.487 33.753,13.487 34.017,13.224 35.093,13.224 35.876,14.007 38.582,14.007
  BOTTOM w0.09: v1(9.673,13.717) 9.943,13.987 11.023,13.987 11.101,14.065 11.725,14.065 U8.F8@12.073,13.717 ; v1(20.163,13.717) 20.433,13.987 21.513,13.987 21.591,14.065 22.215,14.065 U7.F8@22.563,13.717 ; v1(46.203,13.717) 46.473,13.987 47.553,13.987 47.631,14.065 48.255,14.065 U6.F8@48.603,13.717 ; v1(56.693,13.717) 56.963,13.987 58.043,13.987 58.121,14.065 58.745,14.065 U5.F8@59.093,13.717 ; v1(63.406,12.645) 63.442,12.608 64.032,12.608 R85.1@64.187,12.763
CK0_P: C3.1 R80.1 U1.F7 U2.F7 U3.F7 U4.F7 U5.F7 U6.F7 U7.F7 U8.F7 X1.137 | length 157.5
  TOP w0.09: U1.F7@8.073,13.717 8.153,13.797 9.124,13.797 9.219,13.702 9.219,13.437 9.309,13.347 9.826,13.347 9.907,13.266 9.907,13.151 v1(9.673,12.917) ; U2.F7@18.563,13.717 18.643,13.797 19.614,13.797 19.709,13.702 19.709,13.437 19.799,13.347 20.317,13.347 20.396,13.268 20.396,13.15 v1(20.163,12.917) ; U3.F7@44.603,13.717 44.683,13.797 45.654,13.797 45.749,13.702 45.749,13.437 45.839,13.347 46.339,13.347 46.419,13.267 46.419,13.09 46.246,12.917 v1(46.203,12.917) ; U4.F7@55.093,13.717 55.173,13.797 56.144,13.797 56.239,13.702 56.239,13.437 56.329,13.347 56.842,13.347 56.93,13.259 56.93,13.154 v1(56.693,12.917)
  TOP w0.17: X1.137@34.825,1.365 34.825,2.617 34.906,2.698 34.906,3.096 36.174,4.365 36.174,4.566 36.03,4.71 36.03,4.868 35.805,5.093 35.82,5.108 35.95,5.238 v1(35.95,6.036)
  S5 w0.075: v1(9.673,12.917) 9.673,13.046 9.846,13.219 10.138,13.219 10.298,13.059 10.298,12.044 10.542,11.8 10.542,11.288 12.25,9.58 12.72,9.58 13.084,9.944 13.282,9.944 13.329,9.897
  S5 w0.15: 13.329,9.897 14.163,9.897 14.829,10.563 14.829,11.419 15.099,11.689 15.455,11.689 15.774,11.37 15.774,10.401 16.17,10.005 16.49,10.005 17.837,8.658 19.242,8.658 19.613,9.029 19.613,9.799 20.279,10.465 20.279,11.79 20.482,11.993 20.927,11.993 21.116,11.804 21.116,10.997 21.802,10.311 21.802,9.34 22.249,8.894 22.943,8.894 23.335,9.286 23.335,9.517 23.635,9.817 23.635,10.031 23.848,10.244 25.006,10.244 25.317,10.555 25.317,11.681 25.524,11.888 26.091,11.888 26.321,11.658 26.321,9.077 26.752,8.646 27.604,8.646 27.983,9.025 27.983,11.444 28.23,11.691 28.742,11.691 29.006,11.427 29.006,10.898 29.323,10.581 30.047,10.581 30.564,11.098 30.564,12.166 30.778,12.38 31.504,12.38 31.645,12.239 31.645,9.613 31.614,9.582 31.614,9.437 31.645,9.406 32.393,8.658 32.424,8.627 32.569,8.627 32.6,8.658 34.561,8.658 35.411,9.508 35.411,11.361 35.645,11.595 36.346,11.595 36.812,11.129 36.812,10.641 37.117,10.336 38.12,10.336 38.446,10.662 38.446,11.281 38.735,11.57 40.619,11.57 40.939,11.25 40.939,9.474 40.635,9.17 38.667,9.17 38.2,8.703 38.2,8.317 37.004,7.121 37.004,6.794 36.791,6.581 36.646,6.436 36.35,6.436 v1(35.95,6.036)
  S6 w0.075: v1(9.673,12.917) 9.985,13.23 10.244,13.23 10.582,13.568 10.582,13.705 11.258,14.381 11.598,14.381 12.148,13.831 13.272,13.831 13.658,13.445 13.772,13.331 14.333,13.331 14.779,13.777 14.979,13.777 15.425,13.331 16.064,13.331 16.178,13.445 16.52,13.787 17.039,13.787 17.37,14.118 18.702,14.118 19.144,13.675 19.59,13.23 19.85,13.23 v1(20.163,12.917) 20.475,13.23 20.734,13.23 21.277,13.773 23.82,13.773 24.271,13.322 26.33,13.322 26.805,13.796 27.371,13.796 27.41,13.757 ; 38.582,13.757 38.62,13.795 45.098,13.795 45.665,13.227 45.893,13.227 v1(46.203,12.917) 46.516,13.23 46.774,13.23 47.317,13.773 49.86,13.773 50.188,13.445 50.928,13.445 51.242,13.759 51.242,14.233 51.356,14.346 51.54,14.346 51.654,14.233 51.654,13.759 51.968,13.445 52.708,13.445 53.069,13.806 55.677,13.806 56.283,13.199 56.397,13.199 56.404,13.206 v1(56.693,12.917) 57.008,13.233 57.296,13.233 58.195,14.132 60.142,14.132 60.847,13.427 61.263,13.427 62.103,12.587 62.103,12.434 62.358,12.179 63.122,12.179 v1(63.406,11.894)
  S6 w0.15: 27.41,13.757 28.674,13.757 29.409,13.022 30.967,13.022 31.182,13.237 33.65,13.237 33.913,12.974 35.197,12.974 35.98,13.757 38.582,13.757
  BOTTOM w0.09: v1(9.673,12.917) 9.615,12.917 9.448,13.084 9.448,13.23 9.565,13.347 10.037,13.347 10.127,13.437 10.127,13.702 10.222,13.797 11.193,13.797 U8.F7@11.273,13.717 ; v1(20.163,12.917) 20.108,12.917 19.933,13.092 19.933,13.22 20.06,13.347 20.527,13.347 20.617,13.437 20.617,13.702 20.712,13.797 21.683,13.797 U7.F7@21.763,13.717 ; v1(46.203,12.917) 46.161,12.917 45.986,13.092 45.986,13.264 46.069,13.347 46.567,13.347 46.657,13.437 46.657,13.702 46.752,13.797 47.723,13.797 U6.F7@47.803,13.717 ; v1(56.693,12.917) 56.636,12.917 56.464,13.089 56.464,13.221 56.59,13.347 57.057,13.347 57.147,13.437 57.147,13.702 57.242,13.797 58.213,13.797 U5.F7@58.293,13.717 ; v1(63.406,11.894) 63.449,11.938 64.026,11.938 R80.1@64.187,11.777
CK1_N: R3.2 X1.140 | length 4.2
  BOTTOM w0.17: X1.140@35.575,1.365 35.575,2.599 35.42,2.754 35.42,3.137 36.182,3.899 36.182,4.565 36.248,4.631 36.248,4.864 R3.2@36.477,5.093
CK1_P: R3.1 X1.138 | length 4.2
  BOTTOM w0.17: X1.138@35.075,1.365 35.075,2.635 35.15,2.71 35.15,3.249 35.912,4.011 35.912,4.557 35.764,4.705 35.764,4.866 R3.1@35.537,5.093
CKE0: RN1.4 U1.G3 U2.G3 U3.G3 U4.G3 U5.G3 U6.G3 U7.G3 U8.G3 X1.109 | length 158
  TOP w0.09: v1(10.363,14.529) 10.195,14.361 10.195,14.149 10.385,13.959 11.01,13.959 11.122,14.071 11.608,14.071 11.742,14.205 11.742,14.383 11.608,14.517 U1.G3@11.273,14.517 ; v1(20.853,14.529) 20.685,14.361 20.685,14.149 20.875,13.959 21.5,13.959 21.612,14.071 22.098,14.071 22.232,14.205 22.232,14.383 22.098,14.517 U2.G3@21.763,14.517 ; v1(46.893,14.529) 46.725,14.361 46.725,14.149 46.915,13.959 47.54,13.959 47.652,14.071 48.138,14.071 48.272,14.205 48.272,14.383 48.138,14.517 U3.G3@47.803,14.517 ; v1(57.383,14.529) 57.215,14.361 57.215,14.149 57.405,13.959 58.03,13.959 58.142,14.071 58.628,14.071 58.762,14.205 58.762,14.383 58.628,14.517 U4.G3@58.293,14.517 ; v1(62.656,11.703) 62.96,11.399 64.144,11.399 RN1.4@64.149,11.404
  TOP w0.17: X1.109@27.825,1.365 27.825,3.243 28.125,3.543 28.125,4.355 28.477,4.707 28.477,5.925 v1(29.105,6.553)
  S5 w0.075: 6.693,11.331 6.473,11.551 6.473,12.683 6.707,12.917 8.639,12.917 9.273,13.551 9.273,13.83 9.523,14.08 9.914,14.08 v1(10.363,14.529) 10.613,14.279 10.613,14.09 11.235,13.467 11.235,13.242 11.581,12.896 13.365,12.896 14.007,13.538 15.829,13.538 16.471,12.896 19.14,12.896 19.8,13.556 19.8,13.868 20.049,14.116 20.44,14.116 v1(20.853,14.529) 21.371,14.011 23.256,14.011 23.587,13.68 24.088,13.68 24.357,13.41 26.261,13.41 26.698,13.847 40.659,13.847 41.609,12.896 43.548,12.896 43.798,13.146 43.798,13.565 44.185,13.952 45.925,13.952 46.053,14.08 46.443,14.08 v1(46.893,14.529) 47.143,14.279 47.143,14.09 47.766,13.467 47.766,13.242 48.111,12.896 49.895,12.896 50.537,13.538 52.359,13.538 53.001,12.896 55.67,12.896 56.33,13.556 56.33,13.868 56.579,14.116 56.97,14.116 v1(57.383,14.529) 58.232,13.68 60.443,13.68 60.803,13.32 61.49,13.32 61.914,12.896 61.914,12.445 v1(62.656,11.703)
  S5 w0.15: 6.693,11.331 7.853,11.331 7.985,11.463 8.138,11.463 8.241,11.36 8.241,11.29 8.324,11.207 8.589,11.207 8.754,11.372 8.754,11.992 8.872,12.11 9.468,12.11 9.663,11.915 9.663,10.779 9.401,10.517 7.867,10.517 7.689,10.339 7.689,9.535 8.307,8.917 9.026,8.917 9.236,8.707 9.559,8.707 9.637,8.785 9.637,9.765 9.822,9.95 10.303,9.95 10.375,9.878 10.375,8.863 10.594,8.644 12.931,8.644 13.169,8.406 13.551,8.406 13.744,8.599 13.744,9.049 13.98,9.285 14.366,9.285 14.617,9.034 14.617,8.162 14.81,7.969 15.21,7.969 15.446,8.205 15.446,9.026 15.639,9.219 16.053,9.219 16.231,9.041 16.231,8.198 16.412,8.017 16.879,8.017 17.059,8.197 17.391,8.197 17.571,8.017 19.86,8.017 20.069,8.226 20.069,8.746 20.287,8.964 20.698,8.964 20.919,8.743 20.919,8.233 21.182,7.97 23.977,7.97 24.19,8.183 24.19,9.286 24.41,9.506 25.255,9.506 25.472,9.289 25.472,8.249 25.75,7.971 27.964,7.971 28.176,7.759 28.176,7.431 28.349,7.258 28.749,7.258 30.02,8.529 30.02,9.265 30.271,9.516 30.713,9.516 30.951,9.278 30.951,8.327 31.364,7.914 35.068,7.914 36.481,9.327 36.868,9.327 37.155,9.04 37.155,8.709 35.408,6.962 29.514,6.962 v1(29.105,6.553)
  BOTTOM w0.09: U8.G3@8.073,14.517 8.226,14.364 8.651,14.364 9.034,14.747 9.368,14.747 9.537,14.578 9.537,14.424 9.659,14.302 9.895,14.302 10.122,14.529 v1(10.363,14.529) ; U7.G3@18.563,14.517 18.716,14.364 19.141,14.364 19.524,14.747 19.858,14.747 20.027,14.578 20.027,14.424 20.149,14.302 20.385,14.302 20.612,14.529 v1(20.853,14.529) ; U6.G3@44.603,14.517 44.756,14.364 45.181,14.364 45.564,14.747 45.898,14.747 46.067,14.578 46.067,14.424 46.189,14.302 46.425,14.302 46.652,14.529 v1(46.893,14.529) ; U5.G3@55.093,14.517 55.246,14.364 55.671,14.364 56.054,14.747 56.388,14.747 56.557,14.578 56.557,14.424 56.679,14.302 56.915,14.302 57.142,14.529 v1(57.383,14.529)
DM0: R36.1 X1.12 | length 3.8
  BOTTOM w0.1: X1.12@3.575,1.365 3.575,2.902 4.333,3.66 4.84,3.66 4.948,3.768 R36.1@4.948,4.275
DM0R: R36.2 U1.A7 | length 12.1
  TOP w0.1: U1.A7@8.073,9.717 v1(8.473,9.317)
  S3 w0.1: v1(5.429,5.782) 5.198,5.782 4.867,6.113 4.657,6.113 4.354,6.416 4.354,6.97 4.789,7.405 4.789,7.736 5.698,8.645 5.698,9.503 5.912,9.717 6.335,9.717 6.559,9.493 6.559,9.099 6.744,8.914 7.074,8.914 7.28,9.12 7.28,9.918 7.492,10.13 7.83,10.13 8.051,9.909 8.051,9.499 8.233,9.317 v1(8.473,9.317)
  BOTTOM w0.1: R36.2@4.948,5.025 4.948,5.908 5.06,6.02 5.26,6.02 5.429,5.851 v1(5.429,5.782)
DM1: R56.1 X1.33 | length 3.6
  TOP w0.09: X1.33@8.825,1.365 8.825,2.826 9.231,3.232 9.407,3.232 10.092,3.917 R56.1@10.092,4.275
  TOP w0.1: R56.1@10.055,4.305 R56.1@10.092,4.35
DM1R: R56.2 U8.A7 | length 10.2
  TOP w0.1: R56.2@10.092,5.025 10.075,5.042 10.075,5.928 10.154,6.007 10.444,6.007 10.524,5.927 v1(10.524,5.652)
  S6 w0.1: v1(10.524,5.652) 10.424,5.752 10.424,6.573 10.204,6.793 10.204,7.198 10.397,7.391 10.585,7.391 10.727,7.533 10.727,7.706 10.593,7.84 10.068,7.84 9.924,7.984 9.924,8.174 10.073,8.323 10.843,8.323 10.985,8.465 10.985,8.66 10.827,8.818 10.09,8.818 9.919,8.989 9.919,9.324 10.305,9.71 10.76,9.71 10.873,9.597 v1(10.873,9.317)
  BOTTOM w0.1: v1(10.873,9.317) U8.A7@11.273,9.717
DM2: R37.1 X1.54 | length 2.9
  BOTTOM w0.1: X1.54@14.075,1.365 14.166,1.456 R37.1@14.166,4.275
DM2R: R37.2 U2.A7 | length 12.5
  TOP w0.1: U2.A7@18.563,9.717 v1(18.963,9.317)
  S3 w0.1: v1(13.905,6.437) 13.851,6.383 13.6,6.383 13.176,5.959 13.176,5.62 13.342,5.454 13.561,5.454 13.655,5.548 13.655,5.82 13.869,6.034 14.151,6.034 14.361,6.244 14.361,6.829 15.564,8.032 15.564,8.742 15.762,8.94 16.716,8.94 17.073,9.296 17.715,9.296 17.736,9.317 v1(18.963,9.317)
  BOTTOM w0.1: v1(13.905,6.437) 13.68,6.212 13.68,6.207 13.561,6.088 13.386,6.088 13.226,5.928 13.226,5.793 13.406,5.613 13.578,5.613 R37.2@14.166,5.025
DM3: R57.1 X1.75 | length 3
  TOP w0.1: X1.75@19.325,1.365 19.325,3.59 19.438,3.703 R57.1@19.438,4.275 ; R57.1@19.4,4.313 R57.1@19.438,4.35
DM3R: R57.2 U7.A7 | length 10.5
  TOP w0.1: R57.2@19.438,4.95 R57.2@19.438,5.025 19.438,5.616 v1(19.474,5.652)
  S6 w0.1: v1(19.474,5.652) 19.474,5.591 19.31,5.427 19.31,5.213 19.136,5.039 18.808,5.039 18.669,5.178 18.669,5.814 18.898,6.043 19.259,6.043 19.396,6.18 19.396,6.745 19.575,6.924 19.575,7.641 19.743,7.809 19.94,7.809 20.136,8.005 20.297,8.005 20.482,7.82 20.676,7.82 20.982,8.126 20.982,8.347 20.476,8.853 20.476,9.074 20.606,9.204 20.806,9.204 21.262,8.748 21.497,8.748 21.608,8.859 21.608,9.072 v1(21.363,9.317)
  BOTTOM w0.1: v1(21.363,9.317) U7.A7@21.763,9.717
DM4: R38.1 X1.178 | length 3.1
  BOTTOM w0.1: R38.1@46.517,4.275 46.517,3.783 47.075,3.225 X1.178@47.075,1.365
DM4R: R38.2 U3.A7 | length 11.3
  TOP w0.1: U3.A7@44.603,9.717 v1(45.003,9.317)
  S3 w0.1: v1(45.003,9.317) 44.839,9.481 44.663,9.481 44.339,9.157 44.339,8.748 43.952,8.361 43.952,8.169 44.089,8.032 44.364,8.032 44.529,8.197 44.74,8.197 45.196,7.74 45.421,7.74 45.574,7.587 45.574,7.378 45.472,7.276 45.472,6.895 45.856,6.511 46.074,6.511 46.202,6.639 46.432,6.639 46.56,6.511 46.56,5.419 46.416,5.275 46.225,5.275 46.119,5.169 46.119,4.945 45.952,4.778 45.566,4.778 45.463,4.881 45.463,5.343 v1(45.68,5.56)
  BOTTOM w0.1: v1(45.68,5.56) 45.68,5.573 46.294,5.573 46.517,5.35 R38.2@46.517,5.025
DM5: R58.1 X1.199 | length 3.2
  TOP w0.1: R58.1@51.693,4.275 51.693,3.867 52.325,3.235 X1.199@52.325,1.365
DM5R: R58.2 U6.A7 | length 12.6
  TOP w0.1: R58.2@51.693,5.025 51.693,5.403 52.203,5.913 52.203,6.18 52.065,6.318 v1(51.829,6.318)
  S6 w0.1: v1(47.403,9.317) 47.403,9.451 48.052,10.1 48.448,10.1 48.754,9.794 48.754,9.626 48.592,9.464 48.143,9.464 47.968,9.289 47.968,9.046 48.15,8.864 48.74,8.864 49.11,9.234 49.356,9.234 49.648,8.942 49.748,8.942 49.93,8.76 49.93,8.47 49.528,8.068 49.528,7.842 49.725,7.645 49.811,7.645 49.96,7.794 50.099,7.794 50.232,7.661 50.232,7.503 50.109,7.38 50.109,7.261 50.303,7.067 50.534,7.067 50.612,7.145 51.002,7.145 v1(51.829,6.318)
  BOTTOM w0.1: v1(47.403,9.317) U6.A7@47.803,9.717
DM6: R39.1 X1.220 | length 3.1
  BOTTOM w0.1: R39.1@57.105,4.275 57.105,3.695 57.575,3.225 X1.220@57.575,1.365
DM6R: R39.2 U4.A7 | length 11.2
  TOP w0.1: U4.A7@55.093,9.717 v1(55.493,9.317)
  S3 w0.1: v1(55.493,9.317) 55.977,9.317 56.09,9.43 56.24,9.43 56.324,9.346 56.324,9.147 56.122,8.945 55.806,8.945 55.557,8.696 55.557,7.538 56.157,6.938 56.157,6.517 56.426,6.249 56.926,6.249 57.151,6.023 57.151,5.263 56.818,4.93 56.183,4.93 56.003,5.11 56.003,5.527 56.161,5.685 56.445,5.685 v1(56.52,5.61)
  BOTTOM w0.1: v1(56.52,5.61) 56.52,5.845 56.673,5.998 56.969,5.998 57.105,5.862 R39.2@57.105,5.025
DM7: R59.1 X1.241 | length 3.4
  TOP w0.1: R59.1@61.829,4.275 61.829,3.891 62.825,2.895 X1.241@62.825,1.365 ; R59.1@61.829,4.35 R59.1@61.867,4.313
DM7R: R59.2 U5.A7 | length 12
  TOP w0.1: R59.2@61.829,5.025 61.829,5.329 61.99,5.49 61.99,5.606 62.274,5.89 62.274,6.022 62.051,6.245 v1(61.99,6.245)
  S6 w0.1: v1(57.893,9.317) 58.225,9.317 58.367,9.459 58.367,9.992 58.51,10.135 58.902,10.135 59.05,9.987 59.05,9.732 59.22,9.562 59.468,9.562 59.543,9.637 59.604,9.637 59.903,9.936 59.903,9.997 60.016,10.11 60.222,10.11 60.408,9.924 60.408,9.732 60.668,9.472 60.668,9.047 60.87,8.845 61.041,8.845 61.556,9.36 61.734,9.36 61.94,9.154 61.94,8.992 61.627,8.679 61.627,8.46 61.747,8.34 61.747,8.152 61.609,8.014 61.609,7.853 61.877,7.585 61.877,6.765 61.99,6.652 v1(61.99,6.245)
  BOTTOM w0.1: v1(57.893,9.317) U5.A7@58.293,9.717
DQ00: R32.1 X1.8 | length 3.9
  BOTTOM w0.1: X1.8@2.575,1.365 2.575,2.975 3.2,3.6 3.77,3.6 4.056,3.886 R32.1@4.056,4.275
DQ00R: R32.2 U1.B7 | length 12
  TOP w0.1: U1.B7@8.073,10.517 v1(8.473,10.117)
  S3 w0.1: v1(4.291,7.438) 4.291,7.811 5.287,8.807 5.287,9.707 5.712,10.132 6.382,10.132 6.792,10.542 7.822,10.542 8.048,10.768 8.048,11.348 8.23,11.53 8.63,11.53 8.846,11.314 8.846,10.49 v1(8.473,10.117)
  BOTTOM w0.1: R32.2@4.056,5.025 4.056,5.376 4.46,5.78 4.46,6.13 4.291,6.299 v1(4.291,7.438)
DQ01: R8.1 X1.7 | length 3.8
  TOP w0.1: X1.7@2.325,1.365 2.325,2.61 2.463,2.748 2.463,2.923 3.14,3.6 3.392,3.6 R8.1@4.067,4.275
DQ01R: R8.2 U1.D7 | length 12.8
  TOP w0.1: v1(4.056,5.934) 4.067,5.923 R8.2@4.067,5.025 ; v1(7.673,11.717) U1.D7@8.073,12.117
  S3 w0.1: v1(4.056,5.934) 3.64,6.35 3.64,6.715 3.894,6.969 3.894,7.328 3.745,7.477 3.745,7.839 4.09,8.183 4.09,8.62 3.72,8.99 3.72,9.181 3.998,9.459 4.256,9.459 4.465,9.25 4.75,9.25 4.884,9.384 4.884,10.037 5.011,10.164 5.011,11.083 5.188,11.26 5.497,11.26 5.68,11.077 5.68,10.78 5.918,10.542 6.212,10.542 6.47,10.8 6.47,11.496 6.649,11.675 6.976,11.675 7.211,11.44 7.396,11.44 v1(7.673,11.717)
DQ02: R44.1 X1.20 | length 3.8
  BOTTOM w0.1: X1.20@5.575,1.365 5.575,3.145 6.074,3.644 6.594,3.644 6.891,3.941 R44.1@6.891,4.275
DQ02R: R44.2 U1.D3 | length 12.1
  TOP w0.1: v1(10.873,12.517) U1.D3@11.273,12.117
  S3 w0.1: v1(7.341,6.681) 7.37,6.71 7.37,6.97 8.07,7.67 9.273,7.67 9.5,7.443 9.5,7.44 9.66,7.28 10.03,7.28 10.351,7.601 10.351,7.67 11.648,8.967 11.648,10.452 11.533,10.567 11.528,10.567 11.323,10.772 11.323,11.062 11.33,11.069 11.33,11.494 11.252,11.572 11.252,12.168 10.903,12.517 v1@10.888,12.517
  BOTTOM w0.1: R44.2@6.891,5.025 6.868,5.048 6.868,6.006 7.341,6.479 v1(7.341,6.681)
DQ03: R24.1 X1.21 | length 3.6
  TOP w0.09: X1.21@5.825,1.365 5.825,2.995 6.344,3.514
  TOP w0.1: 6.344,3.514 6.564,3.514 7.197,4.147 R24.1@7.197,4.275
DQ03R: R24.2 U1.C2 | length 13
  TOP w0.1: R24.2@7.197,5.025 7.197,5.817 v1(7.218,5.838) ; U1.C2@12.073,11.317 v1(12.473,10.917)
  S3 w0.1: v1(7.218,5.838) 7.93,5.838 8.119,6.027 9.173,6.027 9.52,5.68 9.6,5.68 9.61,5.67 10.012,5.67 10.674,6.332 10.674,6.735 11.231,7.292 11.684,7.292 11.904,7.512 11.904,7.852 12.469,8.417 12.469,9.321 12.898,9.75 12.898,9.976 13.655,10.733 13.655,11.109 13.472,11.292 12.848,11.292 v1(12.473,10.917)
DQ04: R28.1 X1.4 | length 3.8
  BOTTOM w0.1: X1.4@1.575,1.365 1.575,2.865 2.608,3.898 2.949,3.898 R28.1@3.326,4.275
DQ04R: R28.2 U1.D8 | length 12
  TOP w0.1: U1.D8@7.273,12.117 v1(7.673,12.517)
  S3 w0.1: v1(3.312,7.088) 3.312,8.06 3.21,8.162 3.21,9.237 4.563,10.59 4.563,11.273 5.44,12.15 6.23,12.15 6.36,12.28 6.561,12.28 6.691,12.15 7.77,12.15 7.86,12.24 7.86,12.37 7.713,12.517 v1(7.673,12.517)
  BOTTOM w0.1: v1(3.312,7.088) 3.16,6.936 3.16,6.6 3.64,6.12 3.64,5.8 3.266,5.426 3.266,5.085 R28.2@3.326,5.025
DQ05: R4.1 X1.3 | length 4
  TOP w0.1: X1.3@1.325,1.365 1.3,1.39 1.3,2.59 2,3.29 2.341,3.29 R4.1@3.326,4.275
DQ05R: R4.2 U1.E7 | length 12.7
  TOP w0.1: v1(3.255,5.948) 3.255,5.545 3.326,5.474 R4.2@3.326,5.025 ; v1(7.673,13.317) U1.E7@8.073,12.917
  S3 w0.1: v1(3.255,5.948) 3.2,6.003 3.2,6.634 2.805,7.03 2.805,7.943 2.523,8.225 2.523,9.593 3.35,10.42 3.813,10.42 4.13,10.737 4.13,11.538 5.162,12.57 5.596,12.57 5.935,12.91 7.327,12.91 7.673,13.256 v1(7.673,13.317)
DQ06: R40.1 X1.16 | length 3.8
  BOTTOM w0.1: X1.16@4.575,1.365 4.575,2.75 5.46,3.635 5.46,4.09 5.645,4.275 R40.1@6.1,4.275
DQ06R: R40.2 U1.D2 | length 12
  TOP w0.1: v1(11.673,11.717) U1.D2@12.073,12.117
  S3 w0.1: v1(6.229,5.832) 6.637,6.24 7.67,6.24 8.207,6.777 8.477,6.777 8.493,6.793 10.14,6.793 11.154,7.807 11.154,7.868 12.048,8.762 12.048,11.26 12.16,11.372 12.16,11.63 11.94,11.85 11.806,11.85 v1(11.673,11.717)
  BOTTOM w0.1: R40.2@6.1,5.025 6.1,5.703 v1(6.229,5.832)
DQ07: R20.1 X1.17 | length 3.8
  TOP w0.1: X1.17@4.825,1.365 4.825,2.985 5.02,3.18 5.25,3.18 6.345,4.275 R20.1@6.467,4.275 ; R20.1@6.431,4.324 R20.1@6.467,4.35
DQ07R: R20.2 U1.E3 | length 12.9
  TOP w0.1: v1(6.409,6.632) 6.579,6.462 6.579,5.687 6.409,5.517 6.409,5.083 R20.2@6.467,5.025 ; v1(10.873,13.317) U1.E3@11.273,12.917
  S3 w0.1: v1(6.409,6.632) 6.409,6.669 7.72,7.98 9.96,7.98 10.947,8.967 11.018,8.967 11.248,9.197 11.248,10.273 10.93,10.591 10.93,10.599 10.923,10.606 10.923,11.333 10.488,11.768 10.488,12.932 v1(10.873,13.317)
DQ08: R72.1 X1.28 | length 3.3
  BOTTOM w0.1: X1.28@7.575,1.365 7.575,3.105 8.611,4.141 R72.1@8.611,4.275
DQ08R: R72.2 U8.E3 | length 11.1
  S6 w0.1: v1(8.473,13.317) 8.9,12.89 8.9,12.368 8.448,11.916 8.448,11.662 8.64,11.47 8.64,11.093 8.448,10.901 8.448,10.673 8.831,10.29 8.831,9.106 8.64,8.915 8.031,8.915 7.787,8.671 7.787,8.382 8.044,8.125 8.583,8.125 8.784,7.924 8.784,7.561 8.632,7.409 8.632,6.435 v1(8.649,6.418)
  BOTTOM w0.1: U8.E3@8.073,12.917 v1(8.473,13.317) ; R72.2@8.611,5.025 8.624,5.038 8.624,6.393 v1(8.649,6.418)
DQ09: R52.1 X1.29 | length 3.4
  TOP w0.1: X1.29@7.825,1.365 7.825,3.111 R52.1@8.989,4.275
DQ09R: R52.2 U8.D2 | length 10.3
  TOP w0.1: R52.2@8.989,5.025 9.009,5.045 v1(9.009,5.641)
  S6 w0.1: v1(6.894,12.517) 6.91,12.517 7.079,12.348 7.15,12.348 7.3,12.198 7.3,11.965 6.981,11.646 6.981,11.443 7.296,11.128 7.296,9.793 6.903,9.4 6.903,9.313 7.078,9.138 7.078,8.963 6.99,8.875 6.756,8.875 6.669,8.788 6.669,8.613 6.756,8.525 6.907,8.525 6.994,8.438 6.994,8.263 6.907,8.175 ; 6.919,8.175 6.903,8.159 6.903,7.9 7.785,7.018 7.785,6.745 8.508,6.022 8.664,6.022 9.009,5.677 v1(9.009,5.641)
  BOTTOM w0.1: v1(6.894,12.517) 6.894,12.507 7.27,12.131 U8.D2@7.27,12.114
DQ10: R64.1 X1.41 | length 3.6
  TOP w0.1: X1.41@10.825,1.365 10.825,3.225 11.216,3.616 11.326,3.616 11.639,3.929 R64.1@11.639,4.275 11.562,4.198 11.609,4.29 R64.1@11.639,4.35